# EAGLE board PCB (EAGLE 9.7.0)
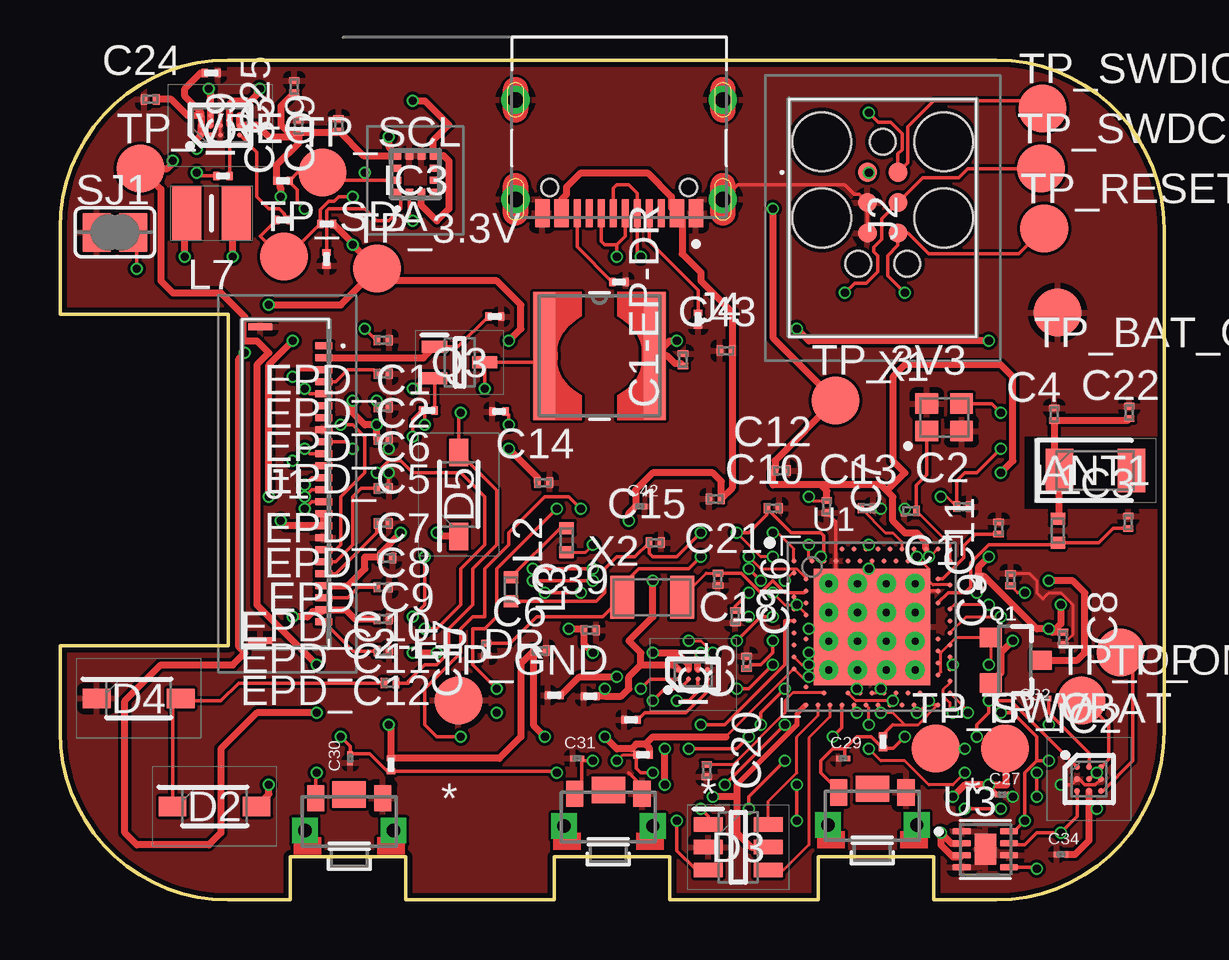
[diagram p0: board, top side]
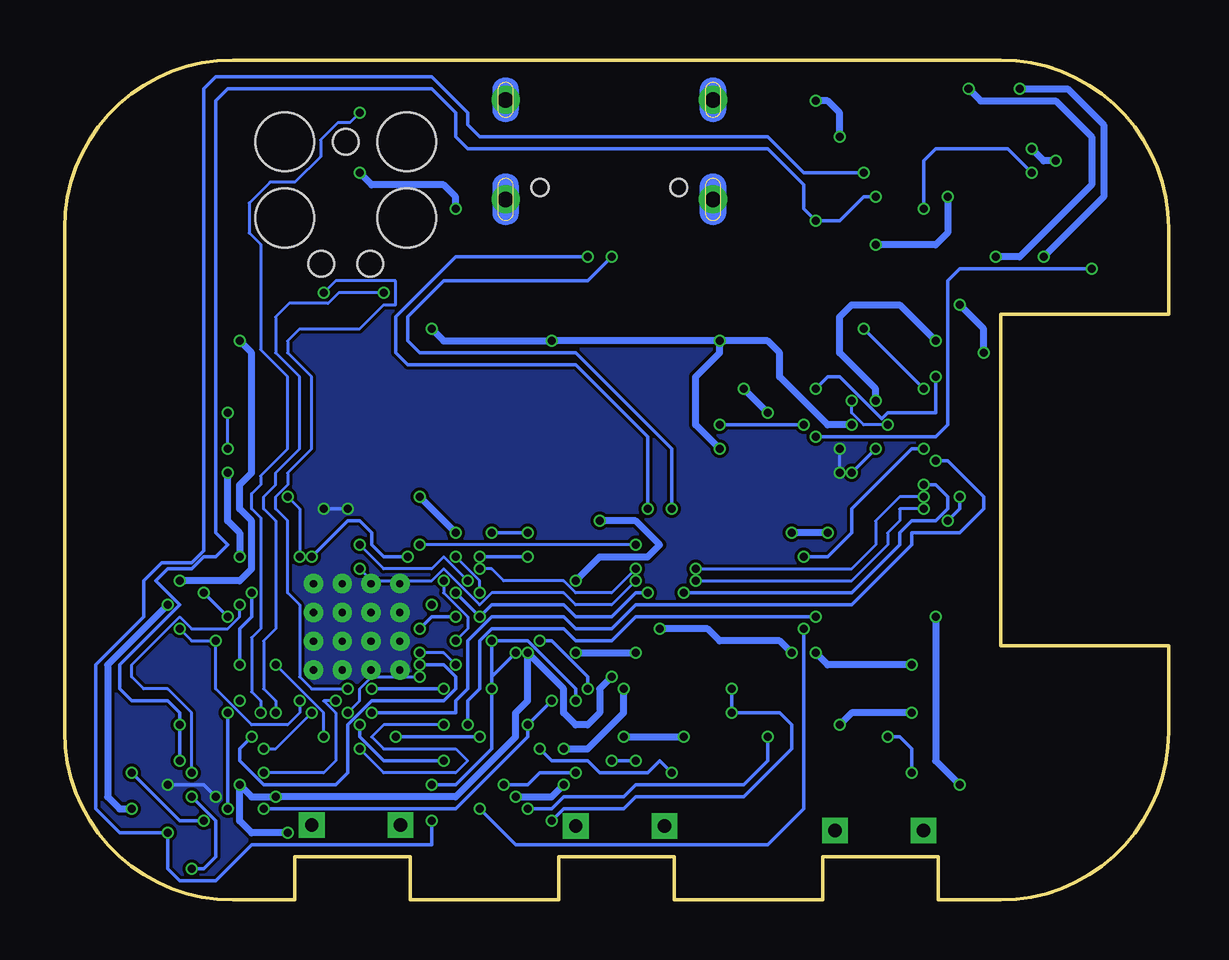
[diagram p1: board, bottom side, seen from below]

Size 46 x 35 mm. Coordinates in mm from the lower left corner, seen from the top.
Outline: 39,0 36.4,0 36.4,1.8 31.6,1.8 31.6,0 25.4,0 25.4,1.8 20.6,1.8 20.6,0 14.4,0 14.4,1.8 9.6,1.8 9.6,0 7,0 arc-90 0,7 0,10.6 7,10.6 7,24.4 0,24.4 0,28 arc-90 7,35 39,35 arc-90 46,28 46,7 arc-90 39,0
Copper layers (1*16): Top 0.035mm / dielectric 1.6mm / Bottom 0.035mm
Design rules "jlcpcb-2layers.dru *": minimum track width 5mil, minimum drill 0.3mm, track to track 5mil, track to pad 5mil, pad to pad 5mil, via to via 5mil, smd to smd 5mil, copper to edge 0.2mm, drill to drill 6mil, minimum pad ring 10mil, minimum via ring 3mil, stop-mask expansion 4mil, vias tented up to drill 0mil, thermal gap 10mil
tRestrict: area 40.2,16.3 to 46.7,19.3
bRestrict: area 40.2,16.3 to 46.7,19.3

## Footprints (pad centres in the part's own frame; a part is rotated, then mirrored left to right if it is on the bottom)
2450AT18B100E_ANTC3216X140N = smd 1.15 x 1.8: 1 -1.5,0; 2 1.5,0
NORDIC_NRF_3_RESC0201_L = smd 0.28 x 0.43: 1 -0.255,0; 2 0.255,0
GRM011R60J152KE01L_1_0201 = smd 0.35 x 0.25: 1 0,0.275; 2 0,-0.275
GRM011R60J152KE01L_2_CAPC0201X13N = smd 0.22 x 0.23: 1 -0.185,0; 2 0.185,0
ESP32_C6_LIBRARY_5_SOD3716X135N = smd 1.15 x 0.8: 1 -1.75,0; 2 1.75,0
ESP32_C6_LIBRARY_3_SOT95P280X145-6N = smd 1.2 x 0.6: 1 -1.25,0.95; 2 -1.25,0; 3 -1.25,-0.95; 4 1.25,-0.95; 5 1.25,0; 6 1.25,0.95
BQ25180YBGR_BGA8C40P2X4_100X155X50 = smd 0.2 x 0.2: A1 -0.2,0.6; A2 0.2,0.6; B1 -0.2,0.2; B2 0.2,0.2; C1 -0.2,-0.2; C2 0.2,-0.2; D1 -0.2,-0.6; D2 0.2,-0.6
DRV2605YZFR_BGA9C50P3X3_144X144X62 = smd 0.25 x 0.25: A1 -0.5,0.5; A2 0,0.5; A3 0.5,0.5; B1 -0.5,0; B2 0,0; B3 0.5,0; C1 -0.5,-0.5; C2 0,-0.5; C3 0.5,-0.5
BMA423_BMA423 = smd 0.3 x 0.35: 1 -0.75,-0.775; 2 -0.25,-0.775; 3 0.25,-0.775; 4 0.75,-0.775; 7 0.75,0.775; 8 0.25,0.775; 9 -0.25,0.775; 10 -0.75,0.775 | smd 0.35 x 0.3: 5 0.775,-0.25; 6 0.775,0.25; 11 -0.775,0.25; 12 -0.775,-0.25
RT6160AWSC_BGA15C40P3X5_140X230X60 = smd 0.216 x 0.216: A1 -0.4,0.8; A2 0,0.8; A3 0.4,0.8; B1 -0.4,0.4; B2 0,0.4; B3 0.4,0.4; C1 -0.4,0; C2 0,0; C3 0.4,0; D1 -0.4,-0.4; D2 0,-0.4; D3 0.4,-0.4; E1 -0.4,-0.8; E2 0,-0.8; E3 0.4,-0.8
503480-2400_5034802400 = smd 0.3 x 0.7: 1 -5.75,1.525; 2 -5.25,1.525; 3 -4.75,1.525; 4 -4.25,1.525; 5 -3.75,1.525; 6 -3.25,1.525; 7 -2.75,1.525; 8 -2.25,1.525; 9 -1.75,1.525; 10 -1.25,1.525; 11 -0.75,1.525; 12 -0.25,1.525; 13 0.25,1.525; 14 0.75,1.525; 15 1.25,1.525; 16 1.75,1.525; 17 2.25,1.525; 18 2.75,1.525; 19 3.25,1.525; 20 3.75,1.525; 21 4.25,1.525; 22 4.75,1.525; 23 5.25,1.525; 24 5.75,1.525 | smd 0.3 x 1: MP1 -6.54,-1.125; MP2 6.54,-1.125
TC2030-IDC_TC2030IDC = smd 0.783 x 0.783: 1 -0.953,-0.635; 2 -0.953,0.635; 3 0.317,-0.635; 4 0.317,0.635; 5 1.588,-0.635; 6 1.588,0.635 | hole 2.451: -2.223,-2.54; -2.223,2.54; 0.952,-2.54; 0.952,2.54 | hole 1.067: -2.223,0; 2.857,-1.016; 2.857,1.016
KH-TYPE-C-16P_KINGHELM_KH-TYPE-C-16P = smd 0.6 x 1.15: A1_B12 -3.2,4.725; A4_B9 -2.4,4.725; A9_B4 2.4,4.725; A12_B1 3.2,4.725 | smd 0.3 x 1.15: A5 -1.25,4.725; A6 -0.25,4.725; A7 0.25,4.725; A8 1.25,4.725; B5 1.75,4.725; B6 0.75,4.725; B7 -0.75,4.725; B8 -1.75,4.725 | drill 0.65 pad 1.05: SH1 -4.32,0; SH2 4.32,0; SH3 -4.32,4.15; SH4 4.32,4.15 | hole 0.7: -2.89,3.65; 2.89,3.65
NORDIC_NRF_2_RESC0402_L = smd 0.5 x 0.6: 1 -0.5,0; 2 0.5,0
ESP32_C6_LIBRARY_2_IND_4828-WE-TPC_WRE = smd 0.9 x 5.3: 1 -2.286,0; 2 2.286,0
MLP2016SR47MT0S1_INDC2016X100N = smd 1.2 x 2.2: 1 -1.028,0; 2 1.028,0
ESP32_C6_LIBRARY_4_ESP32_C6_LIBRARY_4_ESP32_C6_LIBRARY_4_ESP32_C6_LIBRARY_4_ESP32_WROVER_SPARKFUN-DISCRETESEMI_SOT23-3 = smd 0.8 x 0.9: 1 -0.95,-1; 2 0.95,-1; 3 0,1.1
ESP32_C6_LIBRARY_6_SOT65P210X110-3N = smd 1.05 x 0.5: 1 -1.05,0.65; 2 -1.05,-0.65; 3 1.05,0
CPF0201D7K68C1_0201 = smd 0.35 x 0.25: 1 0,0.275; 2 0,-0.275
ESP32_C6_LIBRARY_7_JUMPER_SJ = smd 1.168 x 1.6: 1 -0.762,0; 2 0.762,0
2025-10-22_07-23-44_LIBRARY_SW_EVP-AKE31A_PAN = smd 0.711 x 1.092: 1 -1.4,-0.972; 2 1.4,-0.972 | drill 0.559 pad 0.914 square: 3 -1.848,0.381; 4 1.848,0.381 | smd 1.397 x 1.092: 5 0,-1.124
HECTOR_WATCH_1_TP20R = smd 2 x 2: TP 0,0
NORDIC_NRF_4_AQFN50P700X700X85_HS-74N = smd 4.85 x 4.85: P$74 0,0 | drill 0.3 pad 0.6: P$75 -1.8,1.8; P$76 -0.6,1.8; P$77 0.6,1.8; P$78 1.8,1.8; P$79 -1.8,0.6; P$80 -0.6,0.6; P$81 0.6,0.6; P$82 1.8,0.6; P$83 -1.8,-0.6; P$84 -0.6,-0.6; P$85 0.6,-0.6; P$86 1.8,-0.6; P$87 -1.8,-1.8; P$88 -0.6,-1.8; P$89 0.6,-1.8; P$90 1.8,-1.8 | smd 0.2 x 0.2: P$A8 -1.25,3.25; P$A10 -0.75,3.25; P$A12 -0.25,3.25; P$A14 0.25,3.25; P$A16 0.75,3.25; P$A18 1.25,3.25; P$A20 1.75,3.25; P$A22 2.25,3.25; P$A23 2.75,3.25; P$AA24 3.25,-2.25; P$AB2 -2.75,-2.5; P$AC5 -2,-2.75; P$AC9 -1,-2.75; P$AC11 -0.5,-2.75; P$AC13 0,-2.75; P$AC15 0.5,-2.75; P$AC17 1,-2.75; P$AC19 1.5,-2.75; P$AC21 2,-2.75; P$AC24 3.25,-2.75; P$AD2 -2.75,-3.25; P$AD4 -2.25,-3.25; P$AD6 -1.75,-3.25; P$AD8 -1.25,-3.25; P$AD10 -0.75,-3.25; P$AD12 -0.25,-3.25; P$AD14 0.25,-3.25; P$AD16 0.75,-3.25; P$AD18 1.25,-3.25; P$AD20 1.75,-3.25; P$AD22 2.25,-3.25; P$AD23 2.75,-3.25; P$B1 -3.25,2.75; P$B3 -2.5,2.75; P$B5 -2,2.75; P$B7 -1.5,2.75; P$B9 -1,2.75; P$B11 -0.5,2.75; P$B13 0,2.75; P$B15 0.5,2.75; P$B17 1,2.75; P$B19 1.5,2.75; P$B24 3.25,2.75; P$C1 -3.25,2.25; P$D2 -2.75,2; P$D23 2.75,2; P$E24 3.25,1.75; P$F2 -2.75,1.5; P$F23 2.75,1.5; P$G1 -3.25,1.25; P$H2 -2.75,1; P$H23 2.75,1; P$J1 -3.25,0.75; P$J24 3.25,0.75; P$K2 -2.75,0.5; P$L1 -3.25,0.25; P$L24 3.25,0.25; P$M2 -2.75,0; P$N1 -3.25,-0.25; P$N24 3.25,-0.25; P$P2 -2.75,-0.5; P$P23 2.75,-0.5; P$R1 -3.25,-0.75; P$R24 3.25,-0.75; P$T2 -2.75,-1; P$T23 2.75,-1; P$U1 -3.25,-1.25; P$U24 3.25,-1.25; P$V23 2.75,-1.5; P$W1 -3.25,-1.75; P$W24 3.25,-1.75; P$Y2 -2.75,-2; P$Y23 2.75,-2
ESP32_C6_LIBRARY_SON50P200X200X80-9N = smd 0.76 x 0.27: 1 -0.985,0.75; 2 -0.985,0.25; 3 -0.985,-0.25; 4 -0.985,-0.75; 5 0.985,-0.75; 6 0.985,-0.25; 7 0.985,0.25; 8 0.985,0.75 | smd 0.9 x 1.3: 9 0,0
NORDIC_NRF_BT-XTAL_2016_N = smd 0.95 x 0.85: 1 -0.725,-0.575; 2 0.725,-0.575; 3 0.725,0.575; 4 -0.725,0.575
NORDIC_NRF_1_XTAL_3215_N = smd 1 x 1.8: 1 -1.25,0; 2 1.25,0

## Placement (x,y rotation side)
ANT1  2450AT18B100E  [2450AT18B100E_ANTC3216X140N]  43.14,17.9 0 top
C1  12pF  [NORDIC_NRF_3_RESC0201_L]  35.43,16.21 180 top
C1-EP-DR  10uF  [NORDIC_NRF_3_RESC0201_L]  25.96,22.51 90 top
C2  12pF  [NORDIC_NRF_3_RESC0201_L]  37.62,16.39 0 top
C2-EP-DR  4.7uF/25V  [NORDIC_NRF_3_RESC0201_L]  13.75,9.04 0 top
C3  1pF  [NORDIC_NRF_3_RESC0201_L]  44.51,15.74 90 top
C4  1pF  [NORDIC_NRF_3_RESC0201_L]  41.43,20.24 90 top
C5  100nF  [NORDIC_NRF_3_RESC0201_L]  28.61,9.9 90 top
C6  4.7uF  [NORDIC_NRF_3_RESC0201_L]  20,10.39 0 top
C7  100nF  [NORDIC_NRF_3_RESC0201_L]  31.95,16.39 270 top
C8  100nF  [NORDIC_NRF_3_RESC0201_L]  41.79,10.9 270 top
C9  820pF  [NORDIC_NRF_3_RESC0201_L]  39.61,13.35 90 top
C10  [NORDIC_NRF_3_RESC0201_L]  29.71,16.32 0 top
C11  100pF  [NORDIC_NRF_3_RESC0201_L]  39.11,15.5 90 top
C12  100nF  [NORDIC_NRF_3_RESC0201_L]  30.05,17.89 0 top
C13  [NORDIC_NRF_3_RESC0201_L]  33.63,16.32 0 top
C14  4.7uF  [NORDIC_NRF_3_RESC0201_L]  20.15,17.39 0 top
C15  1.0uF  [NORDIC_NRF_3_RESC0201_L]  24.8,14.89 0 top
C16  47nF  [NORDIC_NRF_3_RESC0201_L]  28.14,11.81 270 top
C17  12pF  [NORDIC_NRF_3_RESC0201_L]  17.76,10.44 90 top
C18  12pF  [NORDIC_NRF_3_RESC0201_L]  27.41,13.36 90 top
C19  100nF  [NORDIC_NRF_3_RESC0201_L]  11.61,32.3 90 top
C20  4.7uF  [NORDIC_NRF_3_RESC0201_L]  26.95,5.39 270 top
C21  4.7uF  [NORDIC_NRF_3_RESC0201_L]  27.3,16.71 180 top
C22  [NORDIC_NRF_3_RESC0201_L]  44.55,20.32 90 top
C23  0.1uF  [GRM011R60J152KE01L_1_0201]  6.31,34.45 270 top
C24  10uF  [NORDIC_NRF_3_RESC0201_L]  3.76,33.36 0 top
C25  22uF  [NORDIC_NRF_3_RESC0201_L]  9.76,33.89 90 top
C27  0.1uF  [GRM011R60J152KE01L_2_CAPC0201X13N]  39.25,4.4 180 top
C29  1uF  [GRM011R60J152KE01L_2_CAPC0201X13N]  32.63,5.9 0 top
C30  1uF  [GRM011R60J152KE01L_2_CAPC0201X13N]  12.09,5.9 90 top
C31  1uF  [GRM011R60J152KE01L_2_CAPC0201X13N]  21.55,5.9 0 top
C32  1uF  [GRM011R60J152KE01L_2_CAPC0201X13N]  41.01,8.4 0 top
C33  22uF  [NORDIC_NRF_3_RESC0201_L]  9.94,32.24 90 top
C34  0.1uF  [GRM011R60J152KE01L_2_CAPC0201X13N]  41.71,1.9 0 top
C37  1uF  [GRM011R60J152KE01L_1_0201]  20.6,8.53 90 top
C38  1uF  [GRM011R60J152KE01L_1_0201]  22.1,8.49 90 top
C39  10uF  [NORDIC_NRF_3_RESC0201_L]  22.09,11.24 0 top
C42  0.1uF  [GRM011R60J152KE01L_2_CAPC0201X13N]  24.17,16.4 0 top
C43  4.7uF  [NORDIC_NRF_3_RESC0201_L]  27.75,22.89 0 top
D2  MBR0530  [ESP32_C6_LIBRARY_5_SOD3716X135N]  6.44,3.9 0 top
D3  USBLC6-2SC6Y  [ESP32_C6_LIBRARY_3_SOT95P280X145-6N]  28.26,2.2 0 top
D4  MBR0530  [ESP32_C6_LIBRARY_5_SOD3716X135N]  3.28,8.4 0 top
D5  MBR0530  [ESP32_C6_LIBRARY_5_SOD3716X135N]  16.62,16.9 90 top
EPD_C1  1uF/50V  [NORDIC_NRF_3_RESC0201_L]  13.46,23.32 180 top
EPD_C2  1uF/50V  [NORDIC_NRF_3_RESC0201_L]  13.46,21.93 180 top
EPD_C5  0.1uF/50V  [NORDIC_NRF_3_RESC0201_L]  13.46,19.19 180 top
EPD_C6  1uF/50V  [NORDIC_NRF_3_RESC0201_L]  13.46,20.54 180 top
EPD_C7  1uF/50V  [NORDIC_NRF_3_RESC0201_L]  13.46,17.15 180 top
EPD_C8  1uF/50V  [NORDIC_NRF_3_RESC0201_L]  13.46,15.69 180 top
EPD_C9  1uF/50V  [NORDIC_NRF_3_RESC0201_L]  13.61,14.25 180 top
EPD_C10  1uF/50V  [NORDIC_NRF_3_RESC0201_L]  13.46,13.03 180 top
EPD_C11  1uF/50V  [NORDIC_NRF_3_RESC0201_L]  13.46,11.71 180 top
EPD_C12  1uF/50V  [NORDIC_NRF_3_RESC0201_L]  13.46,10.37 180 top
IC1  BQ25180YBGR  [BQ25180YBGR_BGA8C40P2X4_100X155X50]  26.38,9.4 90 top
IC2  DRV2605YZFR  [DRV2605YZFR_BGA9C50P3X3_144X144X62]  42.88,5.04 0 top
IC3  BMA421  [BMA423_BMA423]  14.81,30.24 0 top
IC9  RT6160AWSC  [RT6160AWSC_BGA15C40P3X5_140X230X60]  6.68,32.28 90 top
J1  503480-2400  [503480-2400_5034802400]  9.47,17.34 270 top
J2  TC2030-IDC  [TC2030-IDC_TC2030IDC]  34.28,29.37 270 top
J4  KH-TYPE-C-16P  [KH-TYPE-C-16P_KINGHELM_KH-TYPE-C-16P]  23.3,33.34 180 top
L1  3.9nH  [NORDIC_NRF_2_RESC0402_L]  41.58,15.39 90 top
L2  10uH  [NORDIC_NRF_2_RESC0402_L]  21.11,15 90 top
L3  15nH  [NORDIC_NRF_2_RESC0402_L]  18.79,12.95 270 top
L5  68uH  [ESP32_C6_LIBRARY_2_IND_4828-WE-TPC_WRE]  22.48,22.67 0 top
L7  FTC252012SR47MBCA  [MLP2016SR47MT0S1_INDC2016X100N]  6.31,28.61 0 top
Q1  20V/4.2A/52mΩ/1.4W  [ESP32_C6_LIBRARY_4_ESP32_C6_LIBRARY_4_ESP32_C6_LIBRARY_4_ESP32_C6_LIBRARY_4_ESP32_WROVER_SPARKFUN-DISCRETESEMI_SOT23-3]  39.78,9.99 270 top
Q3  SI1308EDL-T1-GE3  [ESP32_C6_LIBRARY_6_SOT65P210X110-3N]  16.65,22.4 0 top
R1_EP_DR  0.47  [CPF0201D7K68C1_0201]  15.35,20.4 90 top
R1_USB  5K1  [CPF0201D7K68C1_0201]  26.59,24.2 180 top
R2  0  [CPF0201D7K68C1_0201]  9.29,28.33 90 top
R2_EP_DR  10K  [CPF0201D7K68C1_0201]  18.11,24.31 270 top
R2_USB  5K1  [CPF0201D7K68C1_0201]  23.29,25.75 90 top
R3  0  [CPF0201D7K68C1_0201]  11.11,26.71 180 top
R4  0  [CPF0201D7K68C1_0201]  6.79,30.17 90 top
R5  10K  [CPF0201D7K68C1_0201]  13.79,5.63 180 top
R7  10K  [CPF0201D7K68C1_0201]  34.29,6.59 180 top
R8  10K  [CPF0201D7K68C1_0201]  24.29,6.05 90 top
R9  10K  [CPF0201D7K68C1_0201]  23.79,7.51 90 top
R17  3K3  [CPF0201D7K68C1_0201]  9.29,29.97 90 top
R18  3K3  [CPF0201D7K68C1_0201]  11.11,28.17 270 top
R_PWR_EPD  10K  [CPF0201D7K68C1_0201]  38.29,13.21 180 top
R_TYPE_SEL  2.2  [CPF0201D7K68C1_0201]  18.29,20.35 90 top
SJ1  [ESP32_C6_LIBRARY_7_JUMPER_SJ]  2.29,27.82 0 top
SW_DN  2025-10-22_07-23-44_LIBRARY_EVP-AKE31ASW_EVP-AKE31A_PAN  [2025-10-22_07-23-44_LIBRARY_SW_EVP-AKE31A_PAN]  33.85,3.51 180 top
SW_ENT  2025-10-22_07-23-44_LIBRARY_EVP-AKE31ASW_EVP-AKE31A_PAN  [2025-10-22_07-23-44_LIBRARY_SW_EVP-AKE31A_PAN]  22.85,3.46 180 top
SW_UP  2025-10-22_07-23-44_LIBRARY_EVP-AKE31ASW_EVP-AKE31A_PAN  [2025-10-22_07-23-44_LIBRARY_SW_EVP-AKE31A_PAN]  12.05,3.27 180 top
TP_3.3V  HECTOR_WATCH_1_TPTP20R  [HECTOR_WATCH_1_TP20R]  13.21,26.32 0 top
TP_3V3  HECTOR_WATCH_1_TPTP20R  [HECTOR_WATCH_1_TP20R]  32.31,20.82 0 top
TP_BAT_GND  HECTOR_WATCH_1_TPTP20R  [HECTOR_WATCH_1_TP20R]  41.57,24.47 0 top
TP_GND  HECTOR_WATCH_1_TPTP20R  [HECTOR_WATCH_1_TP20R]  16.6,8.32 0 top
TP_ON  HECTOR_WATCH_1_TPTP20R  [HECTOR_WATCH_1_TP20R]  44.19,10.32 0 top
TP_OP  HECTOR_WATCH_1_TPTP20R  [HECTOR_WATCH_1_TP20R]  42.56,8.32 0 top
TP_RESET  HECTOR_WATCH_1_TPTP20R  [HECTOR_WATCH_1_TP20R]  41.01,27.97 0 top
TP_SCL  HECTOR_WATCH_1_TPTP20R  [HECTOR_WATCH_1_TP20R]  10.93,30.32 0 top
TP_SDA  HECTOR_WATCH_1_TPTP20R  [HECTOR_WATCH_1_TP20R]  9.33,26.81 0 top
TP_SWDCLK  HECTOR_WATCH_1_TPTP20R  [HECTOR_WATCH_1_TP20R]  40.87,30.47 0 top
TP_SWDIO  HECTOR_WATCH_1_TPTP20R  [HECTOR_WATCH_1_TP20R]  40.94,32.97 0 top
TP_SWO  HECTOR_WATCH_1_TPTP20R  [HECTOR_WATCH_1_TP20R]  36.49,6.32 0 top
TP_VBAT  HECTOR_WATCH_1_TPTP20R  [HECTOR_WATCH_1_TP20R]  39.38,6.32 0 top
TP_VREG  HECTOR_WATCH_1_TPTP20R  [HECTOR_WATCH_1_TP20R]  3.35,30.47 0 top
U1  NRF52840_QF  [NORDIC_NRF_4_AQFN50P700X700X85_HS-74N]  33.83,11.38 0 top
U3  MAX17048G+T10  [ESP32_C6_LIBRARY_SON50P200X200X80-9N]  38.56,2.11 0 top
X1  32MHz  [NORDIC_NRF_BT-XTAL_2016_N]  36.84,20.11 0 top
X2  32.768kHz  [NORDIC_NRF_1_XTAL_3215_N]  24.67,12.61 0 top

## Library data of the parts
ANT1 = InkTime_v5; ARROW_PART_NUMBER: 2450AT18B100E; ARROW_PRICE-STOCK: https://www.arrow.com/en/products/2450at18b100e/johanson-dielectrics?utm_currency=USD&region=nac; DESCRIPTION: Antennas 2.45GHz ANTENNA; HEIGHT: 1.4mm; MANUFACTURER_NAME: JOHANSON TECHNOLOGY; MANUFACTURER_PART_NUMBER: 2450AT18B100E; MOUSER_PART_NUMBER: 609-2450AT18B100E; MOUSER_PRICE-STOCK: https://www.mouser.co.uk/ProductDetail/Johanson-Technology/2450AT18B100E?qs=yCnrNFeXz%252Bh5MFsFIXGZGA%3D%3D
C1 C1-EP-DR C2 C2-EP-DR C3-C8 C11 C12 C14-C21 C24 C25 C33 C37-C39 C43 EPD_C1 EPD_C2 EPD_C5-EPD_C12 L1-L3 R1_EP_DR R1_USB R2 R2_EP_DR R2_USB R3-R5 R7-R9 R17 R18 R_PWR_EPD R_TYPE_SEL SJ1 TP_3.3V TP_3V3 TP_BAT_GND TP_GND TP_ON TP_OP TP_RESET TP_SCL TP_SDA TP_SWDCLK TP_SWDIO TP_SWO TP_VBAT TP_VREG U1 X1 X2 = InkTime_v5
C9 C10 C13 C22 = InkTime_v5; MAXTEMP: N.C.
C23 = InkTime_v5; VAL: 88
C27 C29-C32 C34 C42 = InkTime_v5; AVAILABILITY: In Stock; CHECK_PRICES: https://www.snapeda.com/parts/GRM011R60J152KE01L/Murata/view-part/?ref=eda; DESCRIPTION: SMD Capacitor X5R(EIA) with Capacitance: 1500pF Tol. 10%. Rated Voltage: 6.3Vdc; MF: Murata; MP: GRM011R60J152KE01L; PACKAGE: 0201 Murata; PRICE: None; SNAPEDA_LINK: https://www.snapeda.com/parts/GRM011R60J152KE01L/Murata/view-part/?ref=snap
D2 D4 D5 = InkTime_v5; AVAILABILITY: In Stock; CHECK_PRICES: https://www.snapeda.com/parts/MBR0530/Onsemi/view-part/?ref=eda; DESCRIPTION: Diode Schottky 30 V 500mA Surface Mount SOD-123; MF: ON Semiconductor; MP: MBR0530; PACKAGE: SOD-123-2 ON Semiconductor; PRICE: None; PURCHASE-URL: https://www.snapeda.com/api/url_track_click_mouser/?unipart_id=179458&manufacturer=ON Semiconductor&part_name=MBR0530&search_term=None; SNAPEDA_LINK: https://www.snapeda.com/parts/MBR0530/Onsemi/view-part/?ref=snap
D3 = InkTime_v5; AVAILABILITY: In Stock; CHECK_PRICES: https://www.snapeda.com/parts/USBLC6-2SC6Y/STMicroelectronics/view-part/?ref=eda; DESCRIPTION: 17V Clamp 5A (8/20µs) Ipp Tvs Diode Surface Mount SOT-23-6; MF: STMicroelectronics; MP: USBLC6-2SC6Y; PACKAGE: SOT-23-6 STMicroelectronics; PRICE: None; SNAPEDA_LINK: https://www.snapeda.com/parts/USBLC6-2SC6Y/STMicroelectronics/view-part/?ref=snap
IC1 = InkTime_v5; ARROW_PART_NUMBER: BQ25180YBGR; ARROW_PRICE-STOCK: https://www.arrow.com/en/products/bq25180ybgr/texas-instruments?utm_currency=USD&region=nac; DESCRIPTION: Charger IC Lithium Ion/Polymer, Lithium Iron Phosphate 8-DSBGA (1.6x1.1); HEIGHT: 0.5mm; MANUFACTURER_NAME: Texas Instruments; MANUFACTURER_PART_NUMBER: BQ25180YBGR; MOUSER_PART_NUMBER: 595-BQ25180YBGR; MOUSER_PRICE-STOCK: https://www.mouser.co.uk/ProductDetail/Texas-Instruments/BQ25180YBGR?qs=doiCPypUmgEWjAK%252BJAX6Tw%3D%3D
IC2 = InkTime_v5; ARROW_PART_NUMBER: DRV2605YZFR; ARROW_PRICE-STOCK: https://www.arrow.com/en/products/drv2605yzfr/texas-instruments?region=nac; DESCRIPTION: Haptic Driver for ERM/LRA with Built-In Library and Smart Loop Architecture; HEIGHT: 0.625mm; MANUFACTURER_NAME: Texas Instruments; MANUFACTURER_PART_NUMBER: DRV2605YZFR
IC3 = InkTime_v5; ARROW_PART_NUMBER: BMA423; ARROW_PRICE-STOCK: https://www.arrow.com/en/products/bma423/bosch; DESCRIPTION: Accelerometers Triaxial low-g 12bit Acceleration Sensor; HEIGHT: 1mm; MANUFACTURER_NAME: BOSCH; MANUFACTURER_PART_NUMBER: BMA423; MOUSER_PART_NUMBER: 262-BMA423; MOUSER_PRICE-STOCK: https://www.mouser.co.uk/ProductDetail/Bosch-Sensortec/BMA423?qs=HXFqYaX1Q2xC%252BSgeGoX3mg%3D%3D
IC9 = InkTime_v5; DESCRIPTION: Buck-Boost Regulator Positive Output Step-Up/Step-Down I2C DC-DC Controller IC 15-WL-CSP (BSC) (1.4x2.3); HEIGHT: 0.6mm; MANUFACTURER_NAME: RICHTEK; MANUFACTURER_PART_NUMBER: RT6160AWSC; MOUSER_PART_NUMBER: 835-RT6160AWSC; MOUSER_PRICE-STOCK: https://www.mouser.co.uk/ProductDetail/Richtek/RT6160AWSC?qs=amGC7iS6iy%2FLd9PSoixZXQ%3D%3D
J1 = InkTime_v5; DESCRIPTION: FFC & FPC Connectors 0.5mm FPC RA SMT Dual Contact 24Ckt; HEIGHT: 1.87mm; MANUFACTURER_NAME: Molex; MANUFACTURER_PART_NUMBER: 503480-2400; MOUSER_PART_NUMBER: 538-503480-2400; MOUSER_PRICE-STOCK: https://www.mouser.co.uk/ProductDetail/Molex/503480-2400?qs=OAhjpuo3Vu7efIoxFh9AOw%3D%3D
J2 = InkTime_v5; DESCRIPTION: CABLE ADAPTER 6 POS; HEIGHT: 19mm; MANUFACTURER_NAME: Tag Connect; MANUFACTURER_PART_NUMBER: TC2030-IDC
J4 = InkTime_v5; AVAILABILITY: Not in stock; CHECK_PRICES: https://www.snapeda.com/parts/KH-TYPE-C-16P/Kinghelm/view-part/?ref=eda; MF: kinghelm; MP: KH-TYPE-C-16P; PACKAGE: None; PRICE: None; SNAPEDA_LINK: https://www.snapeda.com/parts/KH-TYPE-C-16P/Kinghelm/view-part/?ref=snap
L5 = InkTime_v5; COPYRIGHT: Copyright (C) 2024 Ultra Librarian. All rights reserved.; MANUFACTURER_PART_NUMBER: 744043680; MFR_NAME: Wurth Electronics
L7 = InkTime_v5; DESCRIPTION: SMD / SMT Inductors (Coils), L=0.47?H, L x W x T :; HEIGHT: 1mm; JLCPCB: https://jlcpcb.com/partdetail/6763488-FTC252012SR47MBCA/C5832368; MANUFACTURER_NAME: TDK; MANUFACTURER_PART_NUMBER: FTC252012SR47MBCA
Q1 = InkTime_v5; PROD_ID: TRAN-14388
Q3 = InkTime_v5; AVAILABILITY: In Stock; CHECK_PRICES: https://www.snapeda.com/parts/SI1308EDL-T1-GE3/Vishay+Siliconix/view-part/?ref=eda; DESCRIPTION: Si1308EDL-T1-GE3 N-channel MOSFET Transistor, 1.5 A, 30 V, 3-Pin SC-70 | Siliconix / Vishay SI1308EDL-T1-GE3; MF: Vishay Siliconix; MP: SI1308EDL-T1-GE3; PACKAGE: SOT-323 Vishay Semiconductor; PRICE: None; PURCHASE-URL: https://www.snapeda.com/api/url_track_click_mouser/?unipart_id=274603&manufacturer=Vishay Siliconix&part_name=SI1308EDL-T1-GE3&search_term=None; SNAPEDA_LINK: https://www.snapeda.com/parts/SI1308EDL-T1-GE3/Vishay+Siliconix/view-part/?ref=snap
SW_DN SW_ENT SW_UP = InkTime_v5; COPYRIGHT: Copyright (C) 2025 Ultra Librarian. All rights reserved.; DIGI-KEY_PART_NUMBER_1: P123437TR-ND; DIGI-KEY_PART_NUMBER_2: P123437CT-ND; DIGI-KEY_PART_NUMBER_3: P123437DKR-ND; MANUFACTURER_NAME: Panasonic; MANUFACTURER_PART_NUMBER: EVP-AKE31A
U3 = InkTime_v5; AVAILABILITY: In Stock; CHECK_PRICES: https://www.snapeda.com/parts/MAX17048G+T10/Analog+Devices/view-part/?ref=eda; DESCRIPTION: 3µA 1-Cell/2-Cell Fuel Gauge with ModelGauge; MF: Analog Devices; MP: MAX17048G+T10; PACKAGE: TDFN-8 Maxim; PRICE: None; PURCHASE-URL: https://www.snapeda.com/api/url_track_click_mouser/?unipart_id=329239&manufacturer=Analog Devices&part_name=MAX17048G+T10&search_term=None; SNAPEDA_LINK: https://www.snapeda.com/parts/MAX17048G+T10/Analog+Devices/view-part/?ref=snap

## Nets
3V3: C6.1 C7.1 C8.1 C12.1 C14.1 C19.1 C25.1 C33.1 C34.2 IC2.C2 IC3.3 IC3.7 IC3.10 IC9.E2 IC9.E3 J2.1 Q1.2 R5.2 R7.2 R8.2 R17.1 R18.1 R_PWR_EPD.2 TP_3.3V.TP TP_3V3.TP U1.P$A22 U1.P$AD14 U1.P$AD23 U1.P$B1 U1.P$W1 U1.P$Y2
ALERT: U1.P$J24 U3.5
D+: D3.4 U1.P$AD6
D-: D3.6 U1.P$AD4
DEC1: C5.1 U1.P$C1
DEC3: C11.1 U1.P$D23
DEC4_6: C10.1 C15.1 C16.1 L3.2 U1.P$B5 U1.P$E24
DN: D3.1 J4.A7 J4.B7
DP: D3.3 J4.A6 J4.B6
EPD_3V3: C1-EP-DR.1 EPD_C5.2 J1.15 J1.16 L5.2 Q1.3
EPD_BUSY: J1.9 U1.P$AD12
EPD_CS: J1.12 U1.P$K2
EPD_DC: J1.11 U1.P$AD10
EPD_RST: J1.10 U1.P$AC11
GDR: J1.2 Q3.1 R2_EP_DR.2
GND: C1-EP-DR.2 C1.2 C2.2 C3.2 C4.2 C5.2 C6.2 C7.2 C8.2 C9.2 C10.2 C11.2 C12.2 C13.2 C14.2 C15.2 C16.2 C17.1 C18.1 C19.2 C20.2 C21.2 C22.2 C23.1 C24.1 C25.2 C27.1 C29.1 C30.1 C31.1 C32.1 C33.2 C34.1 C37.1 C38.1 C39.2 C42.2 C43.1 D3.2 D4.1 EPD_C1.1 EPD_C2.1 EPD_C5.1 EPD_C6.1 EPD_C7.1 EPD_C8.1 EPD_C9.1 EPD_C10.1 EPD_C11.1 EPD_C12.1 IC1.D2 IC2.B1 IC2.B3 IC3.8 IC3.9 IC9.B1 IC9.C1 IC9.C2 IC9.C3 J1.8 J1.17 J1.MP1 J1.MP2 J2.3 J2.5 J4.A1_B12 J4.A12_B1 J4.SH1 J4.SH2 J4.SH3 J4.SH4 R1_USB.1 R2_EP_DR.1 R2_USB.2 R3.1 R9.1 R_TYPE_SEL.1 SJ1.1 SW_DN.1 SW_ENT.1 SW_UP.1 TP_BAT_GND.TP TP_GND.TP U1.P$74 U1.P$75 U1.P$76 U1.P$77 U1.P$78 U1.P$79 U1.P$80 U1.P$81 U1.P$82 U1.P$83 U1.P$84 U1.P$85 U1.P$86 U1.P$87 U1.P$88 U1.P$89 U1.P$90 U1.P$B7 U1.P$F23 U3.1 U3.4 U3.6 U3.9 X1.2 X1.4
HAPTIC_EN: IC2.A1 U1.P$U1
IMU_INT1: U1.P$N1
IMU_INT2: U1.P$P2
LX1: IC9.B2 IC9.B3 L7.1
LX2: IC9.D2 IC9.D3 L7.2
MOSI: J1.14 U1.P$B13
MU_INT1: IC3.5
MU_INT2: IC3.6
N$1: IC3.1 R3.2
N$2: IC9.E1 R2.2
N$3: IC9.D1 R4.2
N$4: C9.1 U1.P$N24
N$5: IC1.D1 R9.2
N$6: C13.1 U1.P$A18
N$7: C3.1 L1.1 U1.P$H23
N$8: C1.1 U1.P$B24 X1.1
N$9: C2.1 U1.P$A23 X1.3
N$10: L2.2 L3.1
N$11: L2.1 U1.P$B3
N$12: C20.1 U1.P$AC5
N$13: C32.2 IC2.A2
N$14: C2-EP-DR.2 D5.2 L5.1 Q3.3
N$15: C2-EP-DR.1 D2.1 D4.2
N$16: J4.A5 R1_USB.2
N$17: J4.B5 R2_USB.1
N$18: EPD_C2.2 J1.4
N$19: EPD_C1.2 J1.5
N$20: R1_EP_DR.1 R_TYPE_SEL.2 SJ1.2
N$21: EPD_C6.2 J1.18
N$22: EPD_C7.2 J1.19
N$23: EPD_C8.2 J1.20
N$25: EPD_C10.2 J1.22
N$27: EPD_C12.2 J1.24
OUT+: IC2.A3 TP_OP.TP
OUT-: IC2.C3 TP_ON.TP
P0.00/XL1: C17.2 U1.P$D2 X2.1
P0.01/XL2: C18.2 U1.P$F2 X2.2
P0.04: U1.P$J1
P0.09: U1.P$L24
P0.13: C30.2 R5.1 SW_UP.2 U1.P$AD8
P0.14: C31.2 R8.1 SW_ENT.2 U1.P$AC9
P0.19: U1.P$AC15
P0.20: U1.P$AD16
P0.21: U1.P$AC17
P0.22: U1.P$AD18
P0.23: U1.P$AC19
P0.24: U1.P$AD20
P0.25: U1.P$AC21
P0.26: U1.P$G1
P0.27: U1.P$H2
P0.28: U1.P$B11
P0.29: U1.P$A10
P0.30: U1.P$B9
P0.31: U1.P$A8
P1.01: Q1.1 R_PWR_EPD.1 U1.P$Y23
P1.02: C29.2 R7.1 SW_DN.2 U1.P$W24
P1.03: U1.P$V23
P1.04: U1.P$U24
P1.05: U1.P$T23
P1.06: U1.P$R24
P1.07: U1.P$P23
P1.09: U1.P$R1
P1.10: U1.P$A20
P1.11: U1.P$B19
P1.12: U1.P$B17
P1.13: U1.P$A16
P1.14: U1.P$B15
P1.15: U1.P$A14
PMIC_INT: IC1.A1 U1.P$T2
PREVGH: D5.1 EPD_C9.2 J1.21
PREVGL: D2.2 EPD_C11.2 J1.23
RESE: J1.3 Q3.2 R1_EP_DR.2
RESET: J2.6 TP_RESET.TP U1.P$AC13
RF: ANT1.1 C4.1 C22.1 L1.2
SCK: J1.13 U1.P$A12
SCL: IC1.B1 IC2.C1 IC3.12 R4.1 R17.2 TP_SCL.TP U1.P$M2 U3.7
SDA: IC1.C1 IC2.B2 IC3.2 R2.1 R18.2 TP_SDA.TP U1.P$L1 U3.8
SWDCLK: J2.4 TP_SWDCLK.TP U1.P$AA24
SWDIO: J2.2 TP_SWDIO.TP U1.P$AC24
SWO: TP_SWO.TP U1.P$AD22
VBAT: C27.2 C37.2 IC1.C2 TP_VBAT.TP U3.2 U3.3
VBUS: C21.1 C38.2 C42.1 C43.2 D3.5 IC1.A2 J4.A4_B9 J4.A9_B4 U1.P$AD2
VREG: C23.2 C24.2 C39.1 IC1.B2 IC9.A1 IC9.A2 IC9.A3 TP_VREG.TP

## Tracks (layer width: path | path; a pad name or v marks a point on that pad's centre or on a via)
3V3  (via drill 0.35)
  Top 0.127: 34.7,7.3 35.2,7.3 | 35.2,7.3 35.75,7.3 U1.P$AD23 36.37,8.13 v36.2,8.3 | U1.P$B1 30.58,14.63 29.91,15.3 v29.7,15.3 | v31.2,16.8 31.36,16.64 C7.1 | 27.75,6.8 U1.P$W1 30.96,9.25 U1.P$Y2 31.12,9.38 v31.2,9.3 | U1.P$AD14 34.2,8.01 v34.2,7.8 34.7,7.8 35.2,7.3
  Top 0.15: R7.2 34.29,6.89 34.7,7.3
  Top 0.3: C33.1 9.94,31.54 9.02,30.61 R17.1 9.16,29.82 9.16,29.68 9.2,29.64 v9.2,29.3 | C25.1 9.2,33.08 9.2,32.3 9.52,31.98 C33.1 | C33.1 11.55,31.98 C19.1 12.64,31.02 IC3.10 13.7,31.37 v13.7,31.8 | C33.1 9.75,31.8 8.7,31.8 8.22,32.28 IC9.E2 IC9.E3 | 13.18,26.32 v12.2,27.3 12.2,27.36 R18.1 | IC3.3 15.06,28.94 15.7,28.3 16.2,28.8 16.2,30.8 15.98,31.02 IC3.7 15.56,31.66 16.2,32.3 15.2,33.3 v14.7,33.3 | v29.7,28.8 29.7,23.43 TP_3V3.TP 29.79,18.3 C12.1 29.7,17.8 29.7,17.3 31.7,17.3 | C34.2 42.3,1.9 42.88,2.48 42.88,3.8 | 42.88,3.8 IC2.C2 | v20.2,6.8 19.75,7.25 C6.1 19.2,9.84 19.2,6.8 18.3,5.91 R5.2 13.79,7.21 v13.7,7.3 | Q1.2 39.2,9.46 39.2,10.3 v39.7,10.8 | C7.1 31.95,17.05 31.7,17.3 | 27.75,6.8 24.7,6.8 24.39,6.49 | 34.45,17.05 34.7,16.8 34.7,15.8 35.2,15.3 35.7,15.3 36.08,14.92 U1.P$A22 | 34.45,17.05 34.2,17.3 31.7,17.3 | v39.2,17.8 39.7,18.3 39.7,21.8 39.2,22.3 35.2,22.3 34.7,21.8 34.7,18.3 35.2,17.8 34.45,17.05 | v41.7,12.3 41.7,11.51 41.34,11.15 | 42.88,3.8 v43.2,3.8 | C14.1 19.89,17.61 v18.7,18.8 | v18.7,23.3 19.2,23.8 19.2,24.8 18.2,25.8 13.7,25.8 13.18,26.32 | v10.7,7.8 8.2,7.8 6.7,6.3 6.7,2.8 6.2,2.3 3.2,2.3 2.7,2.8 2.7,8.3 4.2,9.8 7.2,9.8 7.7,10.3 7.45,10.55 7.45,22.55 v7.7,22.8 | v8.7,24.8 11.7,24.8 13.18,26.28 13.18,26.32 | J2.1 33.68,30.32 v33.7,30.3 | v38.7,14.3 38.29,13.89 R_PWR_EPD.2 38.52,13.48 40.7,11.3 v41.2,11.3 41.34,11.15 | C8.1 41.34,11.15 | TP_3.3V.TP 13.18,26.32 | 24.39,6.49 24.01,6.49 23.82,6.3 23.2,6.3 v22.7,6.8 | R8.2 24.57,6.32 24.39,6.49
  Bottom 0.127: v36.2,8.3 36.2,7.8 36.7,7.3 38.2,7.3 39.7,8.8 v39.7,10.8 40.7,10.8 v41.2,11.3 | v34.2,7.8 33.7,8.3 33.7,8.8 33.2,9.3 v31.2,9.3
  Bottom 0.3: v9.2,29.3 9.2,27.8 9.7,27.3 v12.2,27.3 | v31.2,16.8 v29.7,15.3 | v38.7,14.3 38.7,15.3 39.2,15.8 v39.2,17.8 | v41.7,12.3 44.2,9.8 44.2,4.3 43.7,3.8 v43.2,3.8 | v18.7,18.8 19.7,19.8 19.7,21.8 18.7,22.8 v18.7,23.3 | v7.7,22.8 7.7,23.8 v8.7,24.8 | v10.7,7.8 13.2,7.8 v13.7,7.3 | v13.7,31.8 13.7,32.8 14.2,33.3 v14.7,33.3 | v29.7,28.8 29.7,29.3 30.2,29.8 33.2,29.8 v33.7,30.3 | v22.7,6.8 v20.2,6.8
ALERT  (via drill 0.35)
  Top 0.127: v38.7,12.3 37.25,12.3 U1.P$J24
  Top 0.15: U3.5 40.64,1.36 v40.7,1.3 | v40.7,4.3 v40.7,5.3
  Bottom 0.127: v40.7,5.3 40.7,7.8 41.7,8.8 42.7,8.8 43.2,9.3 43.2,9.8 41.2,11.8 40.7,11.3 39.2,11.3 38.7,11.8 v38.7,12.3
  Bottom 0.15: v40.7,1.3 40.2,1.3 39.7,1.8 39.7,3.3 v40.7,4.3
D+
  Top 0.127: U1.P$AD6 32.08,7.63 31.2,6.75 31.2,2.3 30.15,1.25 D3.4
D-
  Top 0.127: D3.6 29.51,4.11 30.7,5.3 30.7,6.8 31.58,7.68 U1.P$AD4
DEC1  (via drill 0.35)
  Top 0.127: U1.P$C1 30.53,13.63 v30.2,13.3
  Top 0.15: C5.1 28.76,9.8 29.2,9.8 29.7,10.3 v29.7,10.8
  Bottom 0.127: v30.2,13.3 30.2,12.8 29.2,11.8 29.2,11.3 v29.7,10.8
DEC3
  Top 0.15: C11.1 38.14,15.24 37.67,14.77 37.67,14.27 36.78,13.38 U1.P$D23
DEC4_6  (via drill 0.35)
  Top 0.127: U1.P$E24 36.37,13.13 36.2,13.3 36.2,13.8 v35.7,14.3 | v29.7,14.3 29.2,14.3 v28.2,15.3
  Top 0.15: L3.2 22.35,12.45 22.7,12.8 22.7,13.8 23.2,14.3 23.96,14.3 C15.1 24.54,14.45 24.7,14.3 25.7,14.3 v26.7,15.3 | v31.7,14.3 31.83,14.17 U1.P$B5 31.83,15.17 31.7,15.3 30.47,15.3 C10.1 29.46,16.05 28.7,15.3 v28.2,15.3 | v28.7,12.8 28.14,12.24 C16.1
  Bottom 0.127: v28.7,12.8 28.7,13.3 v29.7,14.3
  Bottom 0.15: v31.7,14.3 32.7,14.3 33.2,14.8 33.2,15.3 33.7,15.8 34.2,15.8 v35.7,14.3 | v26.7,15.3 v28.2,15.3
DN  (via drill 0.35)
  Top 0.15: J4.A7 23.05,29.65 23.2,29.8 23.7,29.8 24.05,29.45 J4.B7 24.05,26.95 v24.2,26.8 | v21.7,16.3 21.2,16.8 20.2,16.8 18.7,15.3 18.7,14.8 17.7,13.8 17.7,11.8 17.2,11.8 16.7,11.3 16.7,10.3 15.2,8.8 15.2,7.3 15.7,6.8 v16.7,6.8 | D3.1 27.01,3.49 v26.7,3.8
  Bottom 0.15: v24.2,26.8 29.7,26.8 32.2,24.3 32.2,22.8 31.7,22.3 24.7,22.3 21.7,19.3 v21.7,16.3 | v16.7,6.8 16.7,5.8 17.7,4.8 22.2,4.8 22.7,4.3 25.2,4.3 25.7,3.8 v26.7,3.8
DP  (via drill 0.35)
  Top 0.15: J4.B6 22.55,27.45 22.7,27.3 23.2,27.3 | 23.2,27.3 23.55,27.65 J4.A6 | 23.2,27.3 v23.2,26.8 | v18.2,8.8 17.2,9.8 17.2,11.3 17.7,11.3 18.2,11.8 18.2,13.8 v20.7,16.3 | D3.3 26.51,1.25 25.7,2.06 v25.7,3.3
  Bottom 0.15: v23.2,26.8 24.2,25.8 30.2,25.8 31.7,24.3 31.7,23.3 31.2,22.8 24.7,22.8 20.7,18.8 v20.7,16.3 | v18.2,8.8 v18.2,7.8 16.2,7.8 15.7,7.3 15.7,6.3 17.7,4.3 22.2,4.3 22.7,3.8 25.2,3.8 v25.7,3.3
EPD_3V3  (via drill 0.35)
  Top 0.15: EPD_C5.2
  Top 0.3: C1-EP-DR.1 25.87,22.35 25.63,22.35 25.31,22.67 L5.2 25.4,23.3 v25.7,23.3 | EPD_C5.2 v13.2,19.8 12.7,19.8 12.2,20.3 v12.2,20.8 | J1.15 J1.16 9.41,15.59 v9.2,15.8 | Q1.3 42.39,9.99 42.7,10.3 42.7,12.8 42.2,13.3 v41.2,13.3 | v38.7,23.3 31.2,23.3 v30.7,23.8 | v8.7,16.8 8.7,22.3 v9.7,23.3
  Bottom 0.15: v9.2,15.8 8.7,16.3 v8.7,16.8
  Bottom 0.3: v13.2,19.8 14.2,19.8 16.2,21.8 16.2,22.8 16.7,23.3 v25.7,23.3 30.2,23.3 v30.7,23.8 | v38.7,23.3 38.2,22.8 38.2,17.8 38.7,17.3 38.7,16.3 38.2,15.8 38.2,13.8 38.7,13.3 v41.2,13.3 | v12.2,20.8 12.2,21.3 13.7,22.8 13.7,24.3 13.2,24.8 11.2,24.8 v9.7,23.3
EPD_BUSY  (via drill 0.35)
  Top 0.127: v33.7,7.3 33.7,8.01 U1.P$AD12
  Top 0.15: J1.9 11.91,19.09 v12.2,18.8 | v15.2,11.3 15.7,11.3 16.7,12.3 16.7,13.8 17.7,14.8 17.7,16.8 16.7,17.8 14.7,17.8 14.2,18.3 13.7,18.3 v13.2,17.8 | v28.7,3.8 28.7,4.3 v30.2,5.8
  Bottom 0.15: v12.2,18.8 v13.2,17.8 | v15.2,11.3 15.2,3.8 16.7,2.3 27.2,2.3 v28.7,3.8 | v30.2,5.8 32.7,5.8 33.7,6.8 v33.7,7.3
EPD_CS  (via drill 0.35)
  Top 0.127: U1.P$K2 31.08,11.92 v30.7,12.3 30.2,12.3 v29.7,12.8
  Top 0.15: J1.12 10.49,17.59 v10.2,17.3 | v20.2,12.8 v21.7,12.8
  Bottom 0.15: v21.7,12.8 22.2,12.8 23.2,11.8 24.7,11.8 25.2,12.3 28.2,12.3 v28.7,11.8 v29.7,12.8 | v20.2,12.8 13.2,12.8 11.2,14.8 11.2,15.3 10.7,15.8 9.7,15.8 9.2,16.3 9.2,16.8 9.7,17.3 v10.2,17.3
EPD_DC  (via drill 0.35)
  Top 0.127: v33.2,7.8 33.08,7.92 U1.P$AD10
  Top 0.15: J1.11 9.91,18.09 v9.7,18.3
  Bottom 0.15: v9.7,18.3 9.2,18.3 7.7,16.8 7.7,16.3 8.7,15.3 10.7,15.3 10.7,14.8 13.2,12.3 22.2,12.3 23.2,11.3 24.7,11.3 25.2,11.8 28.2,11.8 29.2,10.8 29.2,8.8 29.7,8.3 29.7,7.8 v33.2,7.8
EPD_RST  (via drill 0.35)
  Top 0.127: v33.2,8.8 33.33,8.67 U1.P$AC11
  Top 0.15: J1.10 10.41,18.59 v10.2,18.8 | v15.2,14.3 15.2,12.3 v14.7,11.8 | v29.2,7.3 29.2,7.8 v30.2,8.8
  Bottom 0.15: v10.2,18.8 10.7,18.8 13.2,16.3 13.2,15.3 14.2,14.3 v15.2,14.3 | v14.7,11.8 22.2,11.8 23.2,10.8 24.7,10.8 25.2,11.3 28.2,11.3 28.7,10.8 28.7,8.8 29.2,8.3 v29.2,7.3 | v30.2,8.8 v33.2,8.8
GDR
  Top 0.15: R2_EP_DR.2 16.57,23.05 Q3.1
  Top 0.3: J1.2 15.14,22.59 Q3.1
GND  (via drill 0.35)
  Top 0.127: IC2.B1 42.46,5.04 | v13.7,18.8 13.7,19.17 EPD_C5.1 | EPD_C7.1 13.7,17.17 v13.7,17.8 | C9.2 40.39,13.61 40.7,13.3 40.7,12.8 40.95,12.55 41.2,12.8 41.7,12.8 42.2,12.3 42.2,11.05 C8.2 | U1.P$85 U1.P$74 | IC9.C3 IC9.C2 IC9.C1
  Top 0.15: J2.5 J2.3 33.3,29.4 33.1,29.4 32.7,29.8 28.23,29.8 J4.SH3 | SW_ENT.1 24.25,4.75 23.7,5.3 | 42.46,5.04 42.7,4.8 43.14,4.8 IC2.B3 | IC2.B1 42.14,4.8 v41.7,4.8 | v39.7,4.3 39.53,4.3 C27.1 | C1.2 35.17,16.27 v35.2,16.3 | v34.2,16.3 33.91,16.3 C13.2 | C7.2 32.33,15.76 U1.P$B7 32.33,13.48 U1.P$75 | U1.P$79 U1.P$75 | U1.P$75 U1.P$76 | U1.P$F23 35.93,12.88 U1.P$78
  Bottom 0.127: v13.7,17.8 v13.7,18.8
  Bottom 0.15: v41.7,4.8 40.2,4.8 v39.7,4.3 | v34.2,16.3 v35.2,16.3
  pour Top: -6.72,-3.12 51.12,-3.12 51.12,37.72 -6.72,37.72
  pour Bottom: -6.72,-3.12 51.12,-3.12 51.12,37.72 -6.72,37.72
HAPTIC_EN  (via drill 0.35)
  Top 0.127: v31.2,9.8 30.91,9.8 U1.P$U1
  Top 0.15: IC2.A1 39.62,8.3 v38.7,8.3 38.7,7.8 38.2,7.3 v38.2,6.8
  Bottom 0.15: v38.2,6.8 38.7,6.3 38.7,5.8 37.7,4.8 34.7,4.8 34.2,5.3 34.2,7.3 33.2,8.3 30.2,8.3 29.7,8.8 29.7,9.3 30.2,9.8 v31.2,9.8
LX1  (via drill 0.35)
  Top 0.3: IC9.B2 IC9.B3 6.28,33.72 v6.2,33.8 | v5.2,26.8 5.2,28.53 L7.1
  Bottom 0.3: v5.2,26.8 2.7,29.3 2.7,32.3 4.2,33.8 v6.2,33.8
LX2  (via drill 0.35)
  Top 0.3: v7.2,26.8 7.2,28.47 L7.2 | IC9.D2 IC9.D3 7.08,33.18 7.2,33.3 7.64,33.3 7.67,33.27 7.92,33.27 8.23,33.58 8.23,33.7 v8.33,33.8
  Bottom 0.3: v8.33,33.8 7.83,33.3 4.7,33.3 3.2,31.8 3.2,29.8 6.2,26.8 v7.2,26.8
MOSI  (via drill 0.35)
  Top 0.127: U1.P$B13 33.83,13.93 v33.7,13.8
  Top 0.15: J1.14 10.49,16.59 v10.2,16.3 | v19.7,13.3 v22.2,13.3
  Bottom 0.127: v10.2,16.3 11.2,16.3 11.2,15.8 11.7,15.3 11.7,14.8 13.2,13.3 v19.7,13.3 | v33.7,13.8 33.2,13.3 30.7,13.3 30.2,13.8 28.7,12.3 28.2,12.8 25.2,12.8 24.7,12.3 23.2,12.3 v22.2,13.3
N$1
  Top 0.15: R3.2 11.11,28.71 11.2,28.8 12.7,28.8 13.2,28.3 13.7,28.3 14.2,28.8 14.2,29.33 IC3.1
N$2
  Top 0.15: R2.2 9.34,28.55 9.34,28.59 9.13,28.8 8.7,28.8 8.2,29.3 8.2,31.16 IC9.E1
N$3
  Top 0.15: R4.2 7.06,31.86 IC9.D1
N$4  (via drill 0.35)
  Top 0.127: U1.P$N24 37.75,11.8 v39.2,11.8 | v40.2,12.8 39.91,12.8 C9.1
  Bottom 0.15: v40.2,12.8 v39.2,11.8
N$5
  Top 0.15: IC1.D1 26.98,8.7 26.08,7.8 24.36,7.8 R9.2
N$6
  Top 0.127: C13.1 34.39,15.3 34.7,15.3 35.08,14.92 U1.P$A18
N$7
  Top 0.15: C3.1 43.89,15.48 43.29,14.89 L1.1 41.49,14.8 38.7,14.8 37.95,14.05 37.95,13.05 37.7,12.8 37,12.8 U1.P$H23
N$8
  Top 0.127: C1.1 37.08,14.81 U1.P$B24
  Top 0.15: X1.1 36.11,17.71 35.69,17.29 C1.1
N$9  (via drill 0.35)
  Top 0.127: U1.P$A23 36.25,14.3 v36.2,14.3 | C2.1 36.95,16.8 v36.7,16.8
  Top 0.15: X1.3 38.81,20.68 v39.2,20.3 | v39.2,18.8 38.2,17.8 37.7,17.8 37.36,17.46 C2.1
  Bottom 0.127: v36.7,16.8 36.2,16.3 v36.2,14.3 | v39.2,18.8 v39.2,20.3
N$10
  Top 0.15: L3.1 20.84,15.5 L2.2
N$11  (via drill 0.35)
  Top 0.127: U1.P$B3 31.2,14.26 v31.2,14.8 | L2.1 21.9,14.5 v22.2,14.8
  Bottom 0.127: v22.2,14.8 v31.2,14.8
N$12
  Top 0.127: C20.1 28.04,5.64 30.2,7.8 30.2,8.3 30.53,8.63 U1.P$AC5
N$13
  Top 0.15: IC2.A2 42.88,6.12 41.2,7.8 C32.2
N$14  (via drill 0.35)
  Top 0.15: L5.1 19.92,22.4 Q3.3 v17.7,21.3 | v16.7,20.3 16.62,20.22 D5.2 18.2,17.07 18.2,14.8 17.2,13.8 17.2,12.3 16.2,11.3 16.2,10.3 15.7,9.8 15.2,9.8 14.5,9.11 14.5,9.04 C2-EP-DR.2
  Bottom 0.3: v16.7,20.3 v17.7,21.3
N$15
  Top 0.15: D2.1 4.69,8.06 D4.2 5.13,8.3 6.7,8.3 7.44,9.04 C2-EP-DR.1
N$16
  Top 0.15: R1_USB.2 26.59,25.41 24.55,27.45 J4.A5
N$17
  Top 0.15: R2_USB.1 21.55,27.21 J4.B5
N$18
  Top 0.15: J1.4 11.5,21.59 12,22.09 13.04,22.09 EPD_C2.2
N$19  (via drill 0.35)
  Top 0.15: EPD_C1.2 13.18,23.32 v12.7,23.8 | J1.5 10.41,21.09 v10.2,21.3
  Bottom 0.15: v10.2,21.3 v12.7,23.8
N$20  (via drill 0.35)
  Top 0.15: v15.2,19.8 15.2,20.27 R1_EP_DR.1 14.7,20.02 v14.7,19.3 | R_TYPE_SEL.2 18.7,20.21 v18.7,19.8 | SJ1.2 3.2,27.67 v3.2,26.3
  Bottom 0.15: v15.2,19.8 v18.7,19.8 | v3.2,26.3 8.7,26.3 9.2,25.8 9.2,19.8 9.7,19.3 v14.7,19.3
N$21  (via drill 0.35)
  Top 0.127: v13.2,20.8 EPD_C6.2
  Top 0.15: J1.18 11.49,14.59 11.7,14.8 11.7,16.8 12.7,17.8 12.7,19.3 12.2,19.8 v11.7,19.8 | EPD_C6.2
  Bottom 0.127: v11.7,19.8 12.7,19.8 13.2,20.3 v13.2,20.8
N$22
  Top 0.15: J1.19 11.49,14.09 12.2,14.8 12.2,16.8 12.55,17.15 EPD_C7.2
N$23
  Top 0.15: J1.20 11.49,13.59 13.2,15.3 EPD_C8.2
N$25
  Top 0.15: J1.22 11.99,12.59 12.43,13.03 EPD_C10.2
N$27
  Top 0.15: J1.24 12.21,10.37 EPD_C12.2
OUT+
  Top 0.15: IC2.A3 43.7,5.86 43.7,7.3 42.68,8.32 TP_OP.TP
OUT-
  Top 0.15: IC2.C3 43.44,4.54 44.7,5.8 44.7,9.81 TP_ON.TP
P0.00/XL1  (via drill 0.35)
  Top 0.127: v28.7,14.3 29.2,13.8 30.7,13.8 31.08,13.42 U1.P$D2
  Top 0.15: C17.2 18.76,10.7 19.86,11.8 22.61,11.8 X2.1 23.42,13.11 24.11,13.8 26.2,13.8 v26.7,14.3
  Bottom 0.15: v28.7,14.3 v26.7,14.3
P0.01/XL2
  Top 0.127: X2.2 26.93,13.61 C18.2
  Top 0.15: U1.P$F2 31,12.8 30.2,12.8 29.7,13.3 29.2,12.8 28.39,13.61 C18.2
P0.13  (via drill 0.35)
  Top 0.15: v26.2,6.3 28.2,6.3 v28.7,6.8 | U1.P$AD8 32.58,7.18 v32.2,6.8 | v10.7,5.3 10.65,5.25 SW_UP.2 | v11.7,6.8 12.09,6.41 C30.2 12.91,6.08 13.7,5.3 13.73,5.3 R5.1 20.64,5.36 v20.7,5.3
  Bottom 0.15: v26.2,6.3 25.7,5.8 24.2,5.8 23.7,5.3 21.7,5.3 21.2,5.8 v20.7,5.3 | v28.7,6.8 v32.2,6.8 | v10.7,5.3 10.7,6.3 11.2,6.8 v11.7,6.8
P0.14  (via drill 0.35)
  Top 0.127: v33.7,6.3 34.2,5.8 35.2,5.8 36.2,4.8 37.2,4.8 v37.7,5.3 | v34.7,8.3 33.16,8.3 U1.P$AC9 | v23.2,5.8 23.45,6.05 R8.1
  Top 0.15: SW_ENT.2 21.73,4.71 C31.2 21.83,5.8 v22.2,5.8 | v27.7,4.8 v30.2,7.3 | v24.7,5.3 24.2,5.3 24.01,5.48 R8.1
  Bottom 0.127: v30.2,7.3 32.7,7.3 33.2,6.8 32.7,6.3 29.7,6.3 29.2,5.8 29.7,5.3 32.7,5.3 v33.7,6.3 | v37.7,5.3 35.2,5.3 34.7,5.8 34.7,7.8 35.2,8.3 v34.7,8.3
  Bottom 0.15: v24.7,5.3 26.2,5.3 26.7,4.8 v27.7,4.8 | v22.2,5.8 v23.2,5.8
P1.01  (via drill 0.35)
  Top 0.127: U1.P$Y23 36.7,9.5 36.7,10.3 37.34,10.94 Q1.1 38.78,9.88 v38.7,9.8
  Top 0.15: R_PWR_EPD.1 38.2,12.84 v38.2,12.8
  Bottom 0.15: v38.2,12.8 38.2,11.8 38.7,11.3 v38.7,9.8
P1.02  (via drill 0.35)
  Top 0.127: v37.2,9.8 37.08,9.68 U1.P$W24
  Top 0.15: SW_DN.2 32.48,4.52 31.7,5.3 31.7,5.8 32.2,6.3 32.7,6.3 | 32.7,6.3 33.2,6.8 33.8,6.8 R7.1 34.72,6.31 v35.2,6.8 | C29.2 32.7,6.02 32.7,6.3
  Bottom 0.127: v35.2,6.8 35.2,7.8 v37.2,9.8
PMIC_INT  (via drill 0.35)
  Top 0.127: v31.2,10.3 31.16,10.3 U1.P$T2 | v26.2,10.8 26.7,10.8 v27.2,10.3
  Top 0.15: IC1.A1 24.6,9.2 v24.2,8.8 | v29.7,9.8 28.7,8.8 v28.2,8.8
  Bottom 0.127: v29.7,9.8 30.2,10.3 v31.2,10.3
  Bottom 0.15: v24.2,8.8 24.2,9.3 25.7,10.8 v26.2,10.8 | v28.2,8.8 28.2,9.3 v27.2,10.3
PREVGH  (via drill 0.35)
  Top 0.3: J1.21 11.99,13.09 12.7,13.8 12.7,14.3 13.3,14.3 EPD_C9.2 13.36,14.45 v14.2,15.3 | D5.1 15.85,15.15 v15.7,15.3
  Bottom 0.3: v14.2,15.3 v15.7,15.3
PREVGL  (via drill 0.35)
  Top 0.3: EPD_C11.2 12.29,11.71 11.91,12.09 J1.23 10.92,12.02 10.53,12.02 10.31,11.8 v9.7,11.8 | D2.2 8.7,4.41 v8.7,4.8
  Bottom 0.3: v9.7,11.8 9.7,5.8 v8.7,4.8
RESE  (via drill 0.35)
  Top 0.15: v14.7,21.3 15.15,21.75 Q3.2 15.62,21.73 R1_EP_DR.2 | J1.3 9.99,22.09 v9.7,21.8
  Bottom 0.15: v9.7,21.8 9.7,20.3 11.7,20.3 11.95,20.05 13.7,21.8 14.2,21.8 v14.7,21.3
RESET  (via drill 0.35)
  Top 0.127: v34.2,8.8 34.03,8.63 U1.P$AC13
  Top 0.15: TP_RESET.TP 39.96,26.92 36.2,26.92 35.33,27.78 J2.6 34.92,27.27 34.49,26.85 34.49,26.01 v35.2,25.3
  Bottom 0.127: v35.2,25.3 34.7,25.8 32.2,25.8 32.2,24.8 32.7,24.8 33.7,23.8 36.2,23.8 36.7,23.3 36.7,22.8 35.7,21.8 35.7,18.8 36.7,17.8 36.7,17.3 37.2,16.8 37.2,16.3 36.7,15.8 36.7,12.8 36.2,12.3 36.2,9.3 35.7,8.8 v34.2,8.8
RF
  Top 0.3: C22.1 44.47,19.98 C4.1 41.43,18.11 ANT1.1 41.64,15.95 L1.2
SCK  (via drill 0.35)
  Top 0.127: U1.P$A12 33.58,14.68 v33.7,14.8
  Top 0.15: J1.13 10.49,17.09 v10.2,16.8 | v19.7,13.8 v22.2,13.8 | v28.7,13.8 v29.2,13.3
  Bottom 0.127: v10.2,16.8 11.2,16.8 12.2,15.8 12.2,14.8 13.2,13.8 v19.7,13.8 | v28.7,13.8 28.2,13.8 27.7,13.3 25.2,13.3 24.7,12.8 23.2,12.8 v22.2,13.8 | v33.7,14.8 32.7,13.8 30.7,13.8 30.2,14.3 v29.2,13.3
SCL  (via drill 0.35)
  Top 0.15: R4.1 5.83,30.17 v5.7,30.3 | v10.2,28.8 9.89,29.11 9.89,29.59 9.56,29.92 R17.2 9.91,30.32 TP_SCL.TP 11.26,29.99 12.7,29.99 | 12.7,29.99 IC3.12 | IC2.C1 42.38,3.48 v41.7,2.8 40.7,2.8 40.2,2.3 39.61,2.3 U3.7 | IC1.B1 26.2,9.18 25.82,8.8 25.2,8.8 v24.7,8.3 | v29.7,11.8 29.2,11.8 v28.2,10.8 | v30.7,3.3 v30.7,4.8 | U1.P$M2 31.12,11.38 v31.2,11.3 | 12.7,29.99 v12.7,30.3
  Bottom 0.15: v5.7,30.3 6.7,31.3 9.7,31.3 10.2,30.8 v10.2,28.8 | v24.7,8.3 24.7,8.8 26.7,10.8 v28.2,10.8 28.2,6.3 29.7,4.8 v30.7,4.8 | v31.2,11.3 30.7,11.8 v29.7,11.8 | v30.7,3.3 30.7,2.3 38.2,2.3 39.7,0.8 41.2,0.8 41.7,1.3 v41.7,2.8 43.7,2.8 44.7,3.8 44.7,9.8 42.7,11.8 42.7,13.3 41.95,14.05 40.7,14.05 40.2,14.55 40.2,33.8 39.7,34.3 30.7,34.3 29.2,32.8 29.2,32.3 28.7,31.8 16.7,31.8 15.2,30.3 v12.7,30.3
SDA  (via drill 0.35)
  Top 0.15: R2.1 8.34,27.66 9.19,26.81 TP_SDA.TP 9.47,26.81 R18.2 10.84,28.75 11.2,29.12 11.43,29.12 11.61,29.3 v12.2,29.3 | v14.7,28.3 14.56,28.44 IC3.2 | IC2.B2 43.14,5.3 v43.2,5.3 | U3.8 39.76,2.86 v40.2,3.3 40.2,5.3 40.7,5.8 | 40.7,5.8 40.7,6.8 39.7,7.8 v39.2,7.8 | U1.P$L1 30.2,11.63 30.2,9.8 27.7,7.3 v26.7,7.3 | v25.7,8.3 26.2,8.3 26.58,8.68 IC1.C1 | v41.2,5.8 40.7,5.8 | v37.7,3.8 v39.2,3.8
  Bottom 0.15: v12.2,29.3 12.7,29.3 13.7,28.3 v14.7,28.3 15.2,28.8 15.2,29.8 16.7,31.3 29.2,31.3 29.7,31.8 29.7,32.8 30.7,33.8 39.2,33.8 39.7,33.3 39.7,15.3 39.2,14.8 39.7,14.3 40.2,14.3 40.7,13.8 41.7,13.8 42.2,13.3 41.2,12.3 43.7,9.8 43.7,8.8 43.2,8.3 41.7,8.3 41.2,7.8 v41.2,7.3 v41.2,5.8 | v43.2,5.3 41.2,3.3 v40.2,3.3 | v39.2,7.8 v39.2,3.8 | v37.7,3.8 29.7,3.8 26.7,6.8 v26.7,7.3 v25.7,8.3
SWDCLK  (via drill 0.35)
  Top 0.127: v37.2,7.8 37.08,7.92 37.08,8.22 36.79,8.51 36.79,8.75 37.08,9.04 U1.P$AA24
  Top 0.15: TP_SWDCLK.TP 37.82,30.47 37.44,30.09 35.95,30.09 J2.4 34.24,28.38 34.24,27.54 33.91,27.21 33.91,27.01 34.07,26.85 34.07,26.18 33.6,25.7 33.1,25.7 v32.7,25.3
  Bottom 0.127: v37.2,7.8 37.2,8.3 37.7,8.8 37.7,10.8 37.2,11.3 37.2,15.8 37.7,16.3 37.7,16.8 37.2,17.3 37.2,17.8 36.2,18.8 36.2,21.8 37.2,22.8 37.2,24.3 36.64,24.86 35.02,24.86 34.58,25.3 v32.7,25.3
SWDIO  (via drill 0.35)
  Top 0.127: U1.P$AC24 37.7,8.01 37.7,7.93 v37.83,7.8
  Top 0.15: TP_SWDIO.TP 40.61,33.3 36.41,33.3 35.32,32.21 35.32,30.73 J2.2 34.92,31.08 35.09,31.26 35.09,31.93 34.61,32.4 34.1,32.4 v33.7,32.8
  Bottom 0.127: v33.7,32.8 34.11,32.39 34.61,32.39 35.33,31.67 35.33,30.98 36.4,29.91 37.44,29.91 38.31,29.04 38.31,27.8 37.83,27.32 37.83,22.93 36.7,21.8 36.7,18.8 37.83,17.67 37.83,17.3 38.2,16.93 38.2,16.3 37.83,15.93 37.83,11.3 38.2,10.93 38.2,8.67 37.83,8.3 v37.83,7.8
SWO  (via drill 0.35)
  Top 0.127: TP_SWO.TP 37.68,6.32 v37.7,6.3 | U1.P$AD22 35.75,7.8 v35.7,7.8
  Bottom 0.127: v37.7,6.3 37.2,6.3 v35.7,7.8
VBAT  (via drill 0.35)
  Top 0.15: C27.2 38.7,4.77 v38.7,4.8
  Top 0.3: TP_VBAT.TP 39.44,6.27 39.44,4.8 v38.7,4.8 37.7,4.8 v37.2,4.3 | v26.7,10.3 26.58,10.18 IC1.C2 | U3.2 37.14,2.36 v36.7,2.8 36.7,2.3 37.2,1.8 37.52,1.8 U3.3 | C37.2 21.64,9.3 v23.2,9.3
  Bottom 0.3: v23.2,9.3 23.7,8.8 23.7,7.8 24.2,7.3 24.7,7.3 25.2,7.8 25.2,8.8 v26.7,10.3 26.7,8.3 27.2,7.8 27.2,6.8 29.7,4.3 v37.2,4.3 38.2,4.3 v38.7,4.8 38.7,3.3 38.2,2.8 v36.7,2.8
VBUS  (via drill 0.35)
  Top 0.2: U1.P$AD2 30.7,7.75 30.7,7.3 28.2,4.8
  Top 0.3: J4.A9_B4 20.9,29.19 21.11,29.4 21.11,29.71 21.7,30.3 24.48,30.3 25.48,29.3 25.48,28.84 J4.A4_B9 25.92,28.39 25.92,26.92 26.7,26.15 26.7,25.8 28,24.49 C43.2 28,17.16 C21.1 27.55,17.45 27.2,17.8 24.7,17.8 23.98,17.08 C42.1 23.7,16.11 v23.7,15.8 | 22.7,8.49 C38.2 | 28.2,4.8 28.2,4.3 | 28.2,4.3 28.2,2.8 28.8,2.2 D3.5 | 22.7,8.49 v22.7,8.8 | 28.2,4.3 v27.2,4.3 | 22.7,8.49 23.39,8.49 23.7,8.8 23.7,9.3 24.2,9.8 | 24.2,9.8 25.58,9.8 IC1.A2 | 24.2,9.8 24.2,10.3 23.7,10.8 24.7,11.8 v24.7,13.3 | v25.2,4.8 v25.2,6.3
  Bottom 0.3: v25.2,6.3 24.2,6.3 22.7,7.8 v22.7,8.8 | v24.7,13.3 23.7,14.3 21.7,14.3 21.2,14.8 22.2,15.8 v23.7,15.8 | v27.2,4.3 25.7,4.3 v25.2,4.8
VREG  (via drill 0.35)
  Top 0.15: 7.7,24.3 7.7,23.3
  Top 0.3: C24.2 4.64,33.36 5.32,32.68 IC9.A3 | IC9.A3 IC9.A2 IC9.A1 5.7,31.7 v5.7,31.3 | IC9.A3 5.88,32.8 5.2,33.48 5.2,33.8 5.85,34.45 C23.2 | v22.2,10.3 21.83,10.67 C39.1 21.78,11.3 v21.2,11.3 | IC1.B2 26.18,9.82 25.7,10.3 v24.7,10.3 | v10.7,9.8 8.2,12.3 8.2,22.3 8.7,22.8 8.2,23.3 7.7,23.3 | v14.7,10.3 v15.7,10.3 | 7.7,24.3 6.7,25.3 4.7,25.3 4.2,25.8 4.2,29.62 TP_VREG.TP 4.47,30.47 4.7,30.7 v4.7,30.8
  Bottom 0.3: v15.7,10.3 16.2,10.8 18.7,10.8 19.2,11.3 v21.2,11.3 | v10.7,9.8 14.2,9.8 v14.7,10.3 | v5.7,31.3 5.2,30.8 v4.7,30.8 | v24.7,10.3 v22.2,10.3